# Altium PCB LMP7721测试放大板.PcbDoc
Units mm, origin at the board's own origin, x right, y up, seen from the top; angles counter-clockwise.
Board outline 38 x 37 mm, 2 copper layers (Top Layer, Bottom Layer); 13 components, 11 nets, 46 pads, 23 vias.
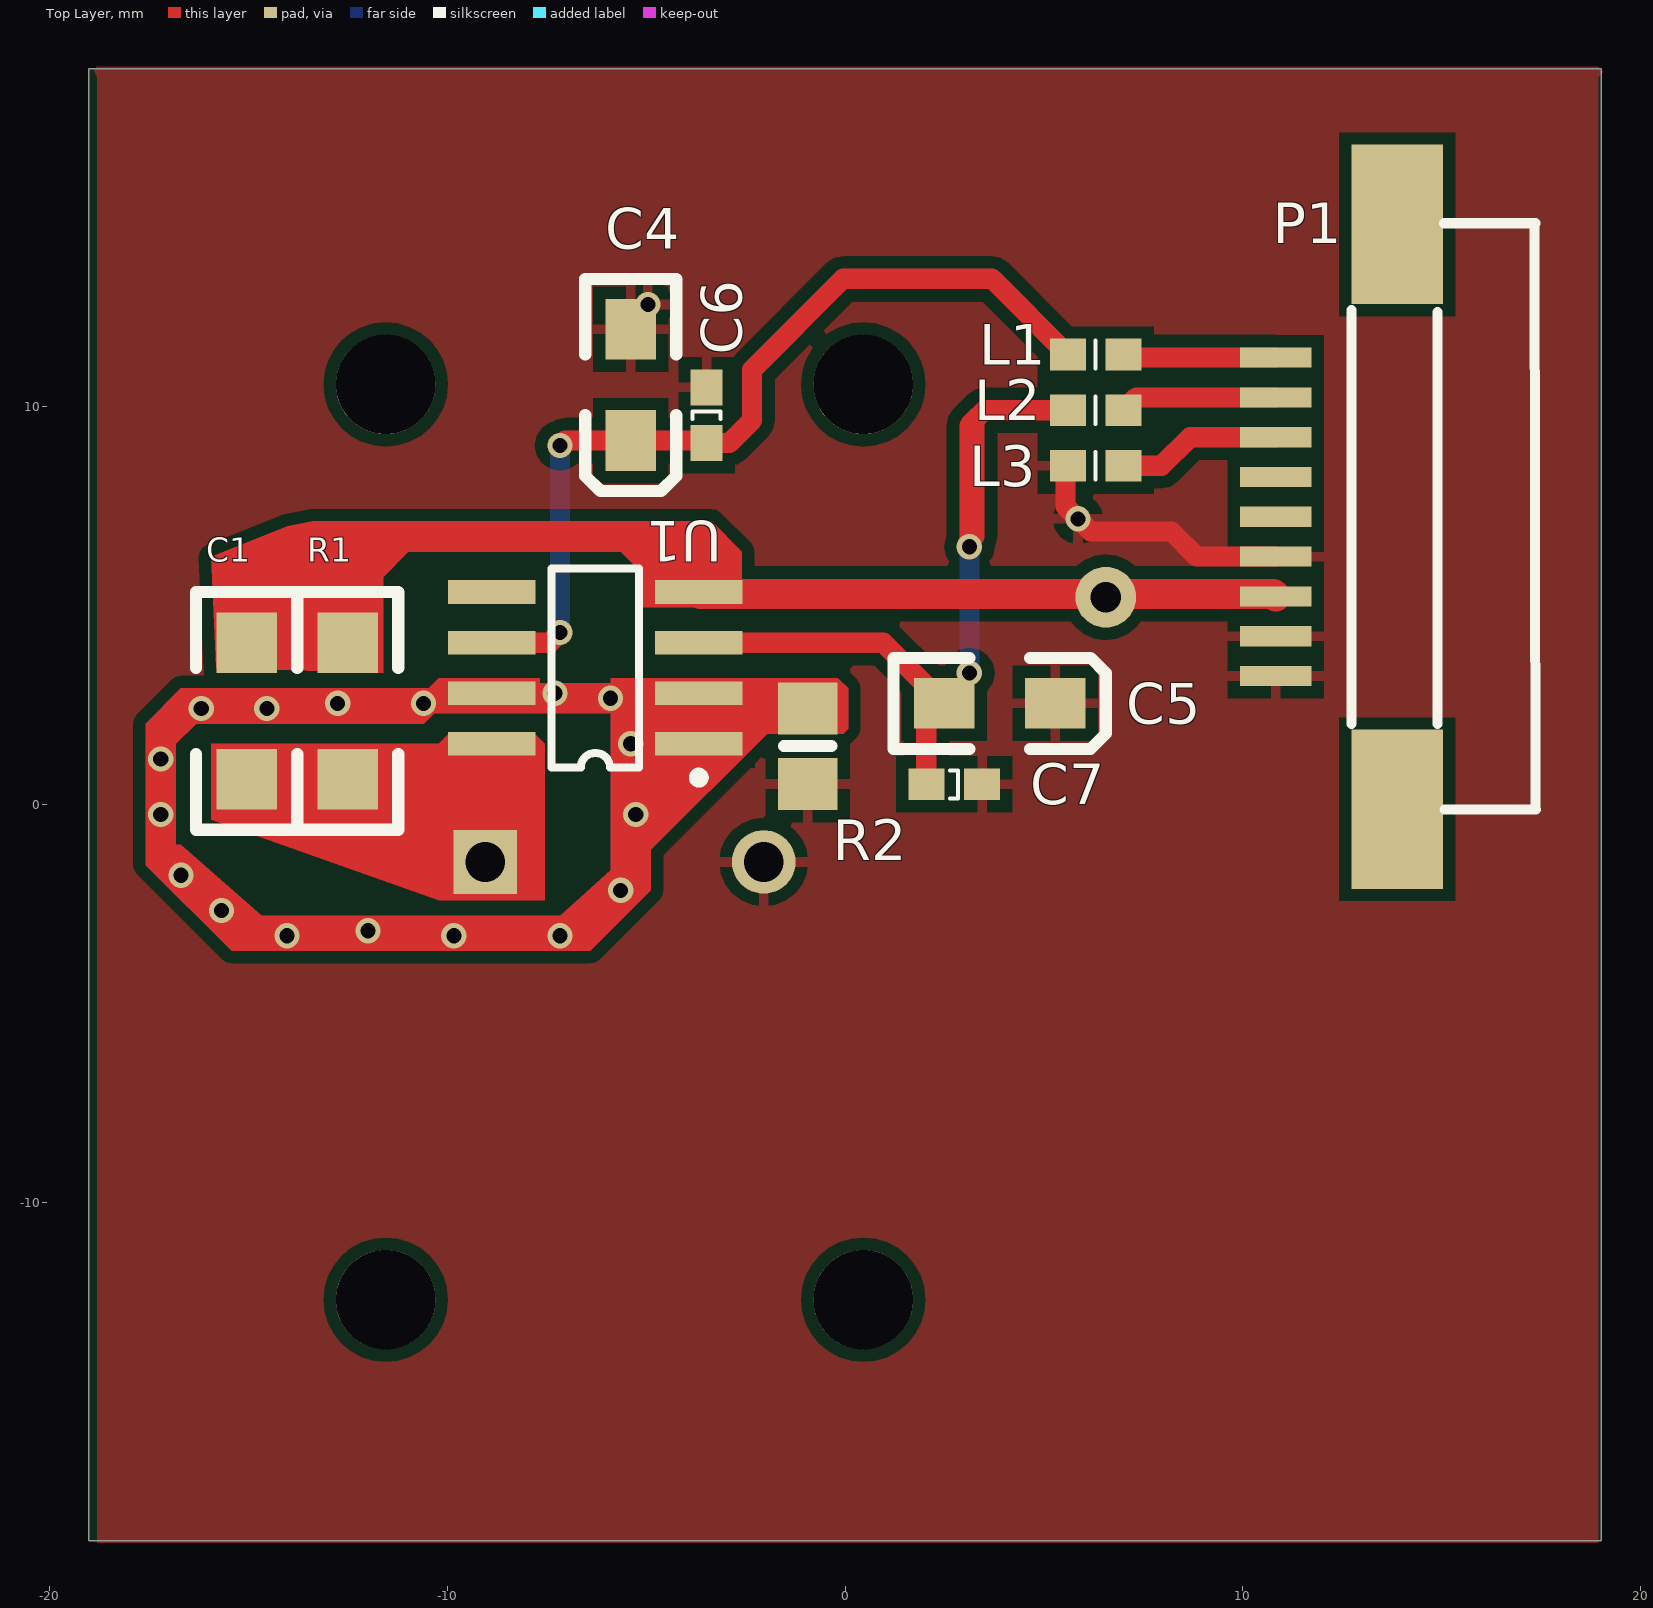
[diagram p0: Top Layer view]
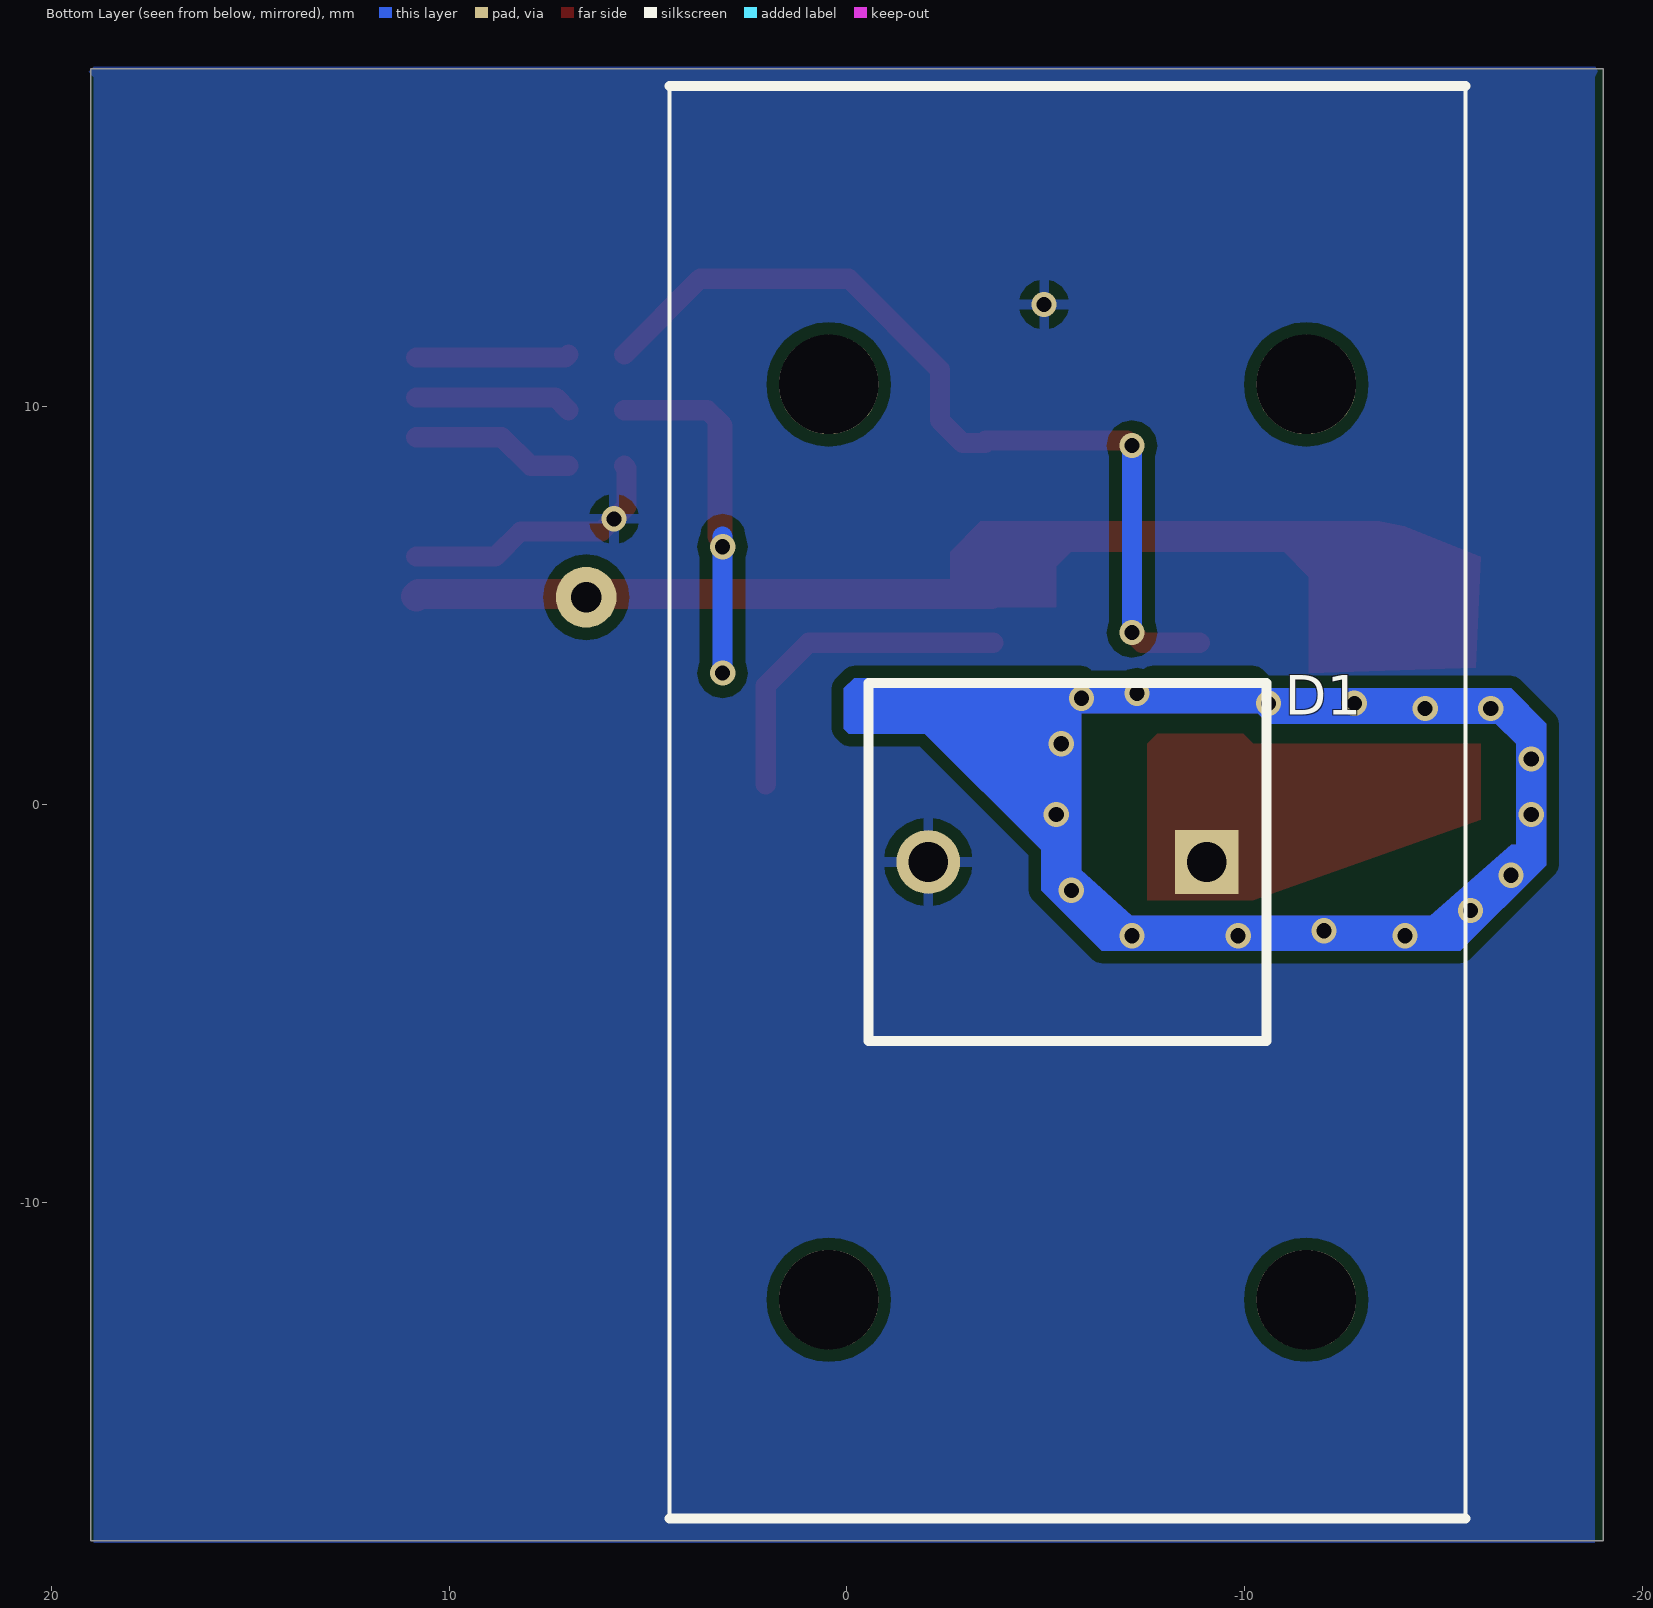
[diagram p1: Bottom Layer view, seen from below]
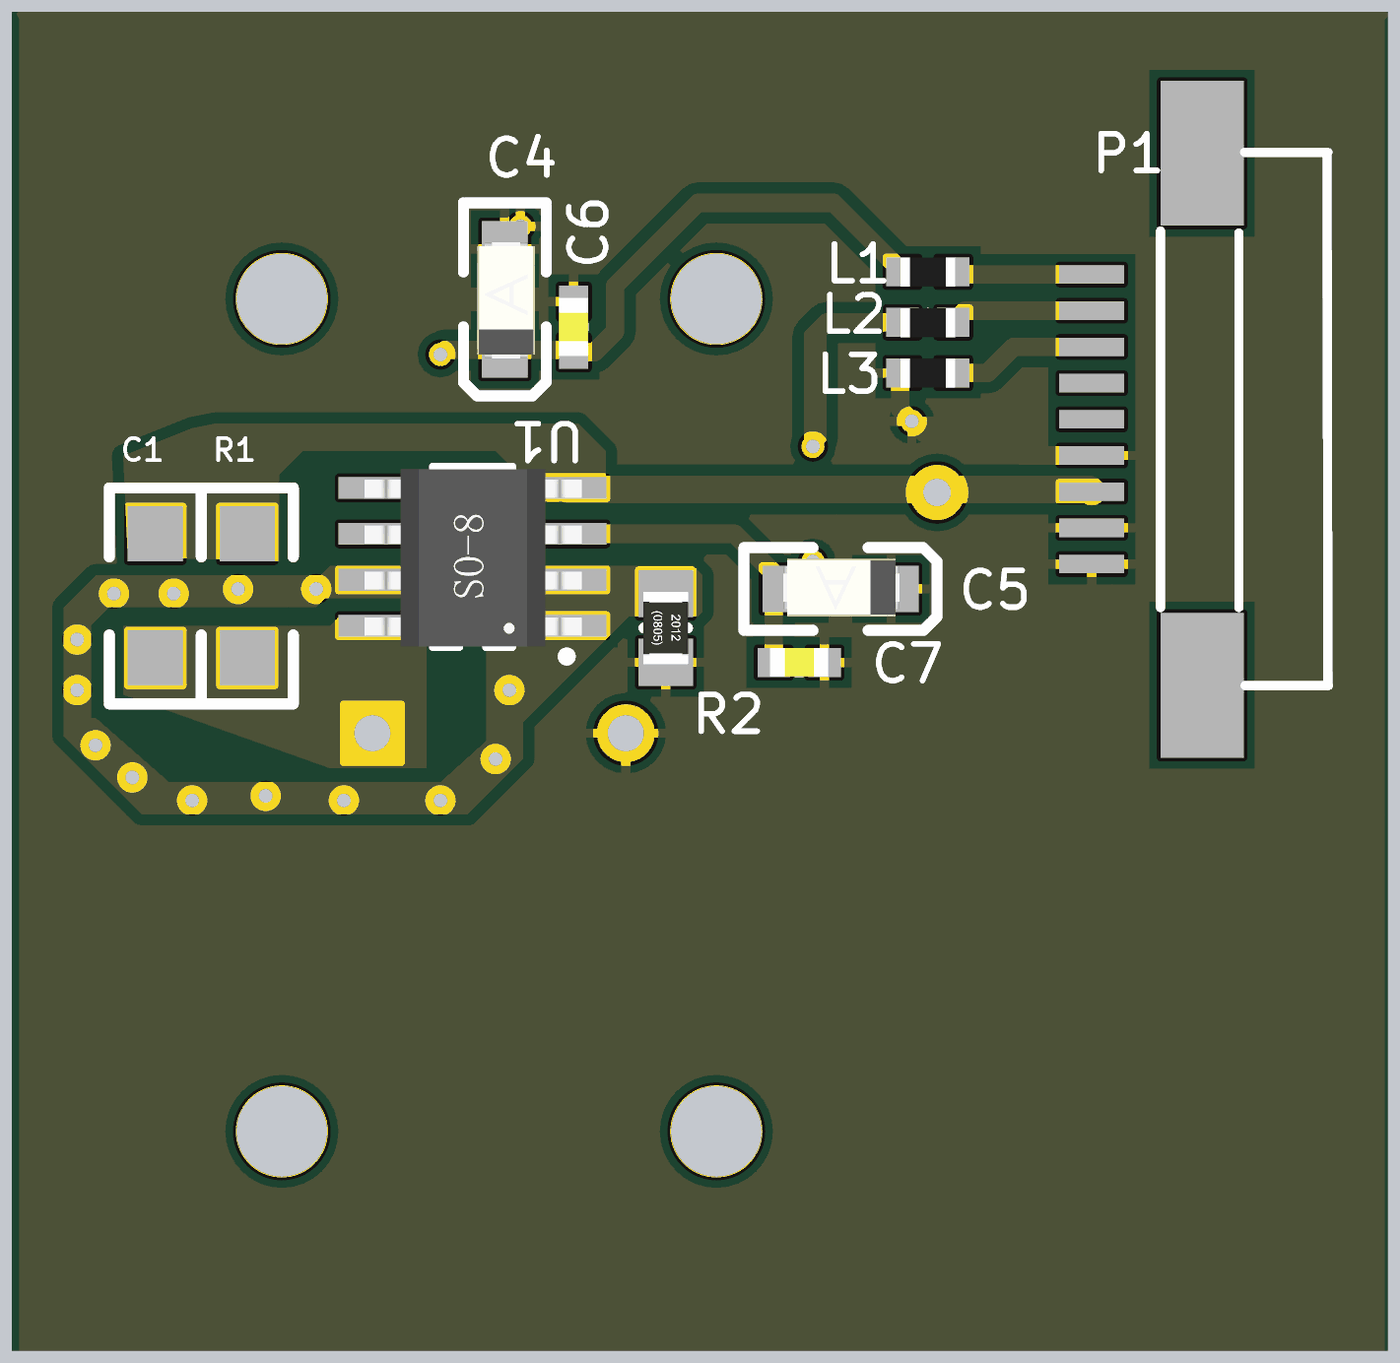
[diagram p2: 3D render of the assembled board from above, using the file's embedded part models]

## Layer stack, top to bottom
Top Layer: signal copper 0.0356
Dielectric: dielectric 0.32, FR-4, Dk 4.8
Bottom Layer: signal copper 0.0356

## Board outline
-19,-18.5 -19,18.5 19,18.5 19,-18.5

## Design rules (kind name [scope] priority, off if disabled: settings)
Clearance [All] p1: gap=0.305
ComponentClearance [All] p1 off: gap=0.254 collisioncheckmode=3 verticalgap=0.254 showdistances=FALSE
PolygonConnect [All] p1: connectstyle=Relief reliefconductorwidth=0.254 reliefentries=4 polygonreliefangle="90 Angle"
RoutingVias [All] p1: holewidth=0.711 width=1.27 viastyle="Through Hole" minholewidth=0.711 minwidth=1.27 maxholewidth=0.711 maxwidth=1.27
SilkscreenOverComponentPads [All] p1: minsilkscreentomaskgap=0.254
SolderMaskExpansion [All] p1: expansion=0.102
Width [All] p1: maxlimit=2.54 minlimit=0.254 preferedwidth=0.254
26 further rules are at their usual default settings.

## Components (designator, comment, footprint, x,y, rotation, side; value= is the part's Value field where it differs from the comment)
C1 "0.1uF" 1206 -15.036,4.073 r270 top
C4 "10uF" 3216 -5.384,9.153 r270 top
C5 "10uF" 3216 5.284,2.549 r0 top
C6 "0.1uF" 1608C -3.479,9.788 r270 top
C7 "0.1uF" 1608C 2.744,0.517 r180 top
D1 "硅光电池" TO-220_A -5.542,-1.437 r0 bottom (schematic designator Q6)
L1 "CBG160808U601T" 1608 6.3,11.312 r180 top
L2 "CBG160808U601T" 1608 6.3,9.915 r180 top
L3 "CBG160808U601T" 1608 6.3,8.518 r180 top
P1 "PFC/1mm-9" FPC-9A 13.793,7.883 r90 top
R1 "1G" 1206 -12.496,4.073 r270 top
R2 "1G" 2012 -0.939,2.422 r270 top
U1 "LMP7721" so8 -6.273,3.438 r180 top

## Footprints (in the part's own frame and the unit in brackets; to place one, negate y for a bottom-side part, rotate by r counter-clockwise, add the part's x,y. Pads: shape width x height; smd on the part's side, far side on the other; paste and mask are expansions set on the pad)
1206 [mil]
  rect 60x60 smd: 1(0,0) 2(135,0)
  silkscreen extent -50,-50 185,50
1608 [mm]
  rect 0.9x0.8 smd: 1(-0.7,0) 2(0.7,0)
  silkscreen extent 0,-0.35 0,0.35, body extent -0.75,-0.39 0.75,0.41, height 0.45
1608C [mm]
  rect 0.9x0.8 smd: 1(-0.7,0) 2(0.7,0)
  silkscreen extent -0.1,-0.35 0.1,0.36, body extent -0.8,-0.41 0.8,0.39, height 0.8
2012 [mm]
  rect 1.3x1.5 smd: 1(0,0) 2(1.9,0)
  silkscreen extent 0.95,-0.6 0.95,0.6, body extent -0.05,-0.62 1.95,0.62, height 0.45
3216 [mil]
  rect 60x50 smd: 1(0,0) 2(-110,0)
  silkscreen extent -160,-45 50,45, body extent -117,-30 9,33, height 63
FPC-9A [mm]
  rect 4x2.3 smd: 0(-7.996,-0.082) 0(6.704,-0.082)
  rect 0.508x1.8 smd: 1(3.354,2.968) 2(2.354,2.968) 3(1.354,2.968) 4(0.354,2.968) 5(-0.646,2.968) 6(-1.646,2.968) 7(-2.646,2.968) 8(-3.646,2.968) 9(-4.646,2.968)
  silkscreen extent -8,-3.57 6.73,1.07
so8 [mm]
  rect 2.2x0.6 smd: 1(-2.6,1.905) 2(-2.6,0.635) 3(-2.6,-0.635) 4(-2.6,-1.905) 5(2.6,-1.905) 6(2.6,-0.635) 7(2.6,0.635) 8(2.6,1.905)
  silkscreen extent -2.72,-2.5 1.1,2.88, body extent -3.72,-2.42 3.69,2.48, height 1.7
TO-220_A [mm] "TO, Thru-Ho"
  rect 1.6x1.6 hole 1: 1(-3.5,0)
  round 1.6 hole 1: 2(3.5,0)

## Part data
C1: library part CAP, "Capacito"
C4 C5: library part ELECTRO1, "Electrolytic Capac"
C6 C7: library part CAP, "Capac"
D1: library part "Header 2", "Header, 2-Pin"
L1 L2 L3: library part Inductor, "Indu"
P1: library part "Header 9", "Header, 9"
R1: library part Res2, "Resisto"
R2: library part Res2, "Resi"
U1: library part ICL

## Free pads (board coordinates)
  round 2.5 hole 2.5: 0(-11.542,-12.437) 0(-11.542,10.563) 0(0.458,-12.437) 0(0.458,10.563)
  round 1.524 hole 0.762: 0(6.554,5.216)

## Via types
v1: diameter 0.635, hole 0.381, Top Layer to Bottom Layer, 23 vias

## Nets (pads, with @x,y where several pads share a name; then routed paths per layer and width w, separated by ;. In a path a pad name is that pad's centre, name@x,y a point inside that pad or via, vN(x,y) a via of type N, cw(c..) or ccw(c..) an arc to the next point about the centre after c; other vN are vias at no path point)
A0: P1.4
A1: P1.5
GND: C4.2 C5.1 C6.1 C7.1 D1.2 L3.2 P1.6 P1.8 P1.9 R2.2 | length 6.9
  Top Layer w0.508: L3.2 5.538,8.456 5.538,7.502 6.173,6.867 8.205,6.867 8.835,6.237 P1.6
  other v1: 5.856,7.184 -4.953,12.573
NetC1_2: C1.2 D1.1 R1.2 U1.8
NetL1_1: L1.1 P1.1 | length 3.9
  Top Layer w0.508: L1.1 7.075,11.237 P1.1
NetL2_1: L2.1 P1.2 | length 4
  Top Layer w0.508: L2.1 7.322,10.237 P1.2
NetL3_1: L3.1 P1.3 | length 4.1
  Top Layer w0.508: L3.1 7.951,8.518 8.67,9.237 P1.3
NetR2_1: R2.1 U1.1 U1.2 U1.7
  other v1: -14.02,-3.293 -9.829,-3.293 -7.162,-3.293 -11.988,-3.166 -15.671,-2.658 -5.638,-2.15 -16.687,-1.769 -17.195,-0.245 -5.257,-0.245 -17.195,1.152 -5.384,1.533 -16.179,2.422 -14.528,2.422 -12.75,2.549 -10.591,2.549 -5.892,2.676 -7.289,2.803
SIGNALOUT: C1.1 P1.7 pad.0@6.554,5.216 R1.1 U1.4 | length 14.5
  Top Layer w0.762: U1.4 -3.628,5.298 10.765,5.298 P1.7
V+: C4.1 C6.2 L1.2 U1.6 | length 22.6
  Top Layer w0.508: U1.6 -7.416,4.073 v1(-7.162,4.327) ; v1(-7.162,9.026) -7.035,9.153 C4.1 C6.2@-3.479,9.153 ; C6.2 -2.909,9.088 -2.336,9.661 -2.336,10.931 -0.05,13.217 3.695,13.217 L1.2
  Bottom Layer w0.508: v1(-7.162,4.327) v1(-7.162,9.026)
V-: C5.2 C7.2 L2.2 U1.3 | length 20.7
  Top Layer w0.508: U1.3 0.966,4.073 2.044,2.995 C7.2 ; v1(3.125,6.486) 3.125,9.534 3.252,9.661 ; v1@3.252,6.74 3.252,9.661 ; L2.2 3.506,9.915 3.252,9.661
  Bottom Layer w0.508: v1(3.125,3.311) v1(3.125,6.486) v1@3.125,6.74
pads on no net: P1.0 U1.5

## Polygon pours and split planes (outlines as drawn)
GND on Top Layer "Top Layer-No Net" (solid, remove dead copper, pour order 2): -18.923,18.542 18.923,18.542 19.05,18.415 18.923,18.288 18.923,-18.542 -18.796,-18.542 -18.796,18.288
GND on Bottom Layer "Top Layer-No Net" (solid, remove dead copper, pour order 2): -18.923,18.542 18.923,18.542 19.05,18.415 18.923,18.288 18.923,-18.542 -18.796,-18.542 -18.796,18.288

## Other copper
Top Layer:
  region net NetR2_1: -7.67,2.549 -10.083,2.549 -10.591,2.041 -16.306,2.041 -16.814,1.533 -16.814,-1.007 -16.687,-1.007 -14.655,-2.785 -7.162,-2.785 -5.892,-1.642 -5.892,3.184 -0.177,3.184 0.077,2.93 0.077,1.914 -0.05,1.787 -1.955,1.787 -4.876,-1.134 -4.876,-2.15 -6.4,-3.674 -15.417,-3.674 -17.576,-1.515 -17.576,2.041 -16.687,2.93 -10.464,2.93 -10.21,3.184 -7.67,3.184
  region net NetR2_1: -9.956,3.184 -9.829,3.057 -4.114,3.057 -4.114,2.295 -10.337,2.295 -10.591,2.549
  region net SIGNALOUT: -2.59,5.089 -2.59,6.359 -3.352,7.121 -13.385,7.121 -14.02,6.994 -15.925,6.232 -15.798,3.438 -11.607,3.311 -11.607,5.724 -10.972,6.359 -5.638,6.359 -5.257,5.978 -5.257,4.962 -2.59,4.962 -2.463,5.089 -2.463,5.343
  region net NetC1_2: -9.956,1.787 -7.797,1.787 -7.543,1.533 -7.543,-2.404 -10.21,-2.404 -15.925,-0.372 -15.925,1.533 -10.21,1.533
Bottom Layer:
  region net NetR2_1: -9.956,3.184 -9.829,3.057 -4.114,3.057 -4.114,2.295 -10.337,2.295 -10.591,2.549
  region net NetR2_1: -7.67,2.549 -10.083,2.549 -10.591,2.041 -16.306,2.041 -16.814,1.533 -16.814,-1.007 -16.687,-1.007 -14.655,-2.785 -7.162,-2.785 -5.892,-1.642 -5.892,3.184 -0.177,3.184 0.077,2.93 0.077,1.914 -0.05,1.787 -1.955,1.787 -4.876,-1.134 -4.876,-2.15 -6.4,-3.674 -15.417,-3.674 -17.576,-1.515 -17.576,2.041 -16.687,2.93 -10.464,2.93 -10.21,3.184 -7.67,3.184

## Silkscreen, mask and mechanical layers (free items; w line width, h text height)
Bottom Overlay:
  lines w0.1: -15.542,-17.937 -15.542,18.063 ; 4.458,-17.937 4.458,18.063
  lines w0.254: -15.542,-17.937 4.458,-17.937 ; -15.542,18.063 4.458,18.063 ; -10.542,-5.937 -0.542,-5.937 -0.542,3.063 -10.542,3.063 -10.542,-5.937
Mechanical 1:
  the board outline again, w0.1